# EAGLE board Servo_Cape (EAGLE 7.7.0)
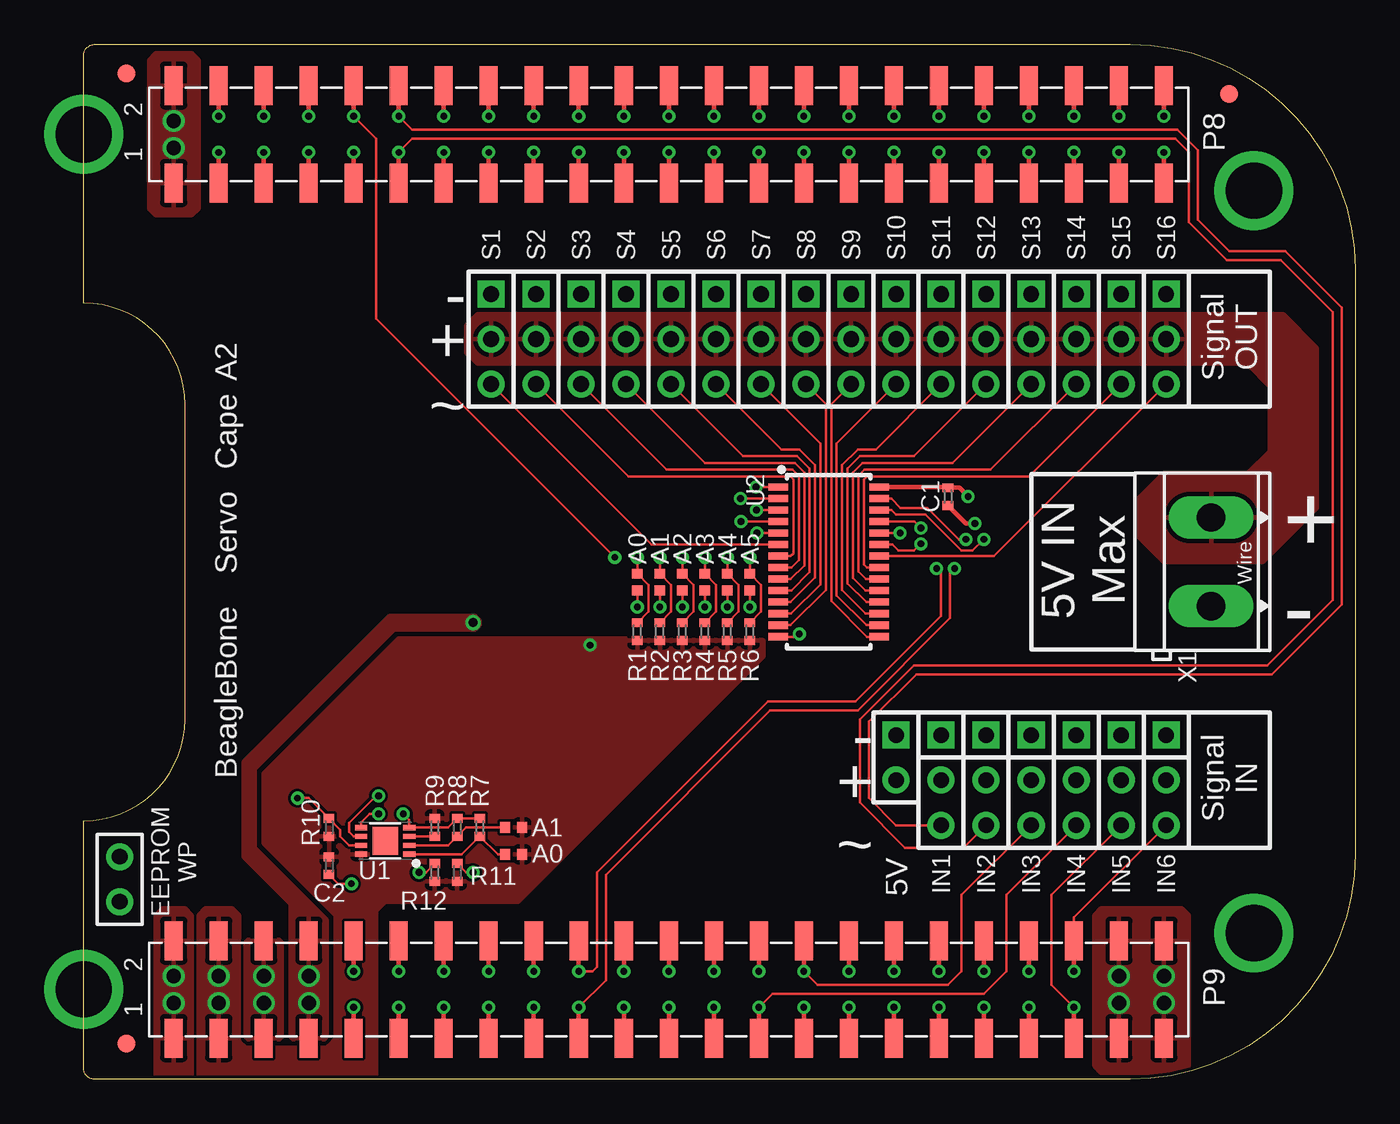
[diagram p0: board, top side]
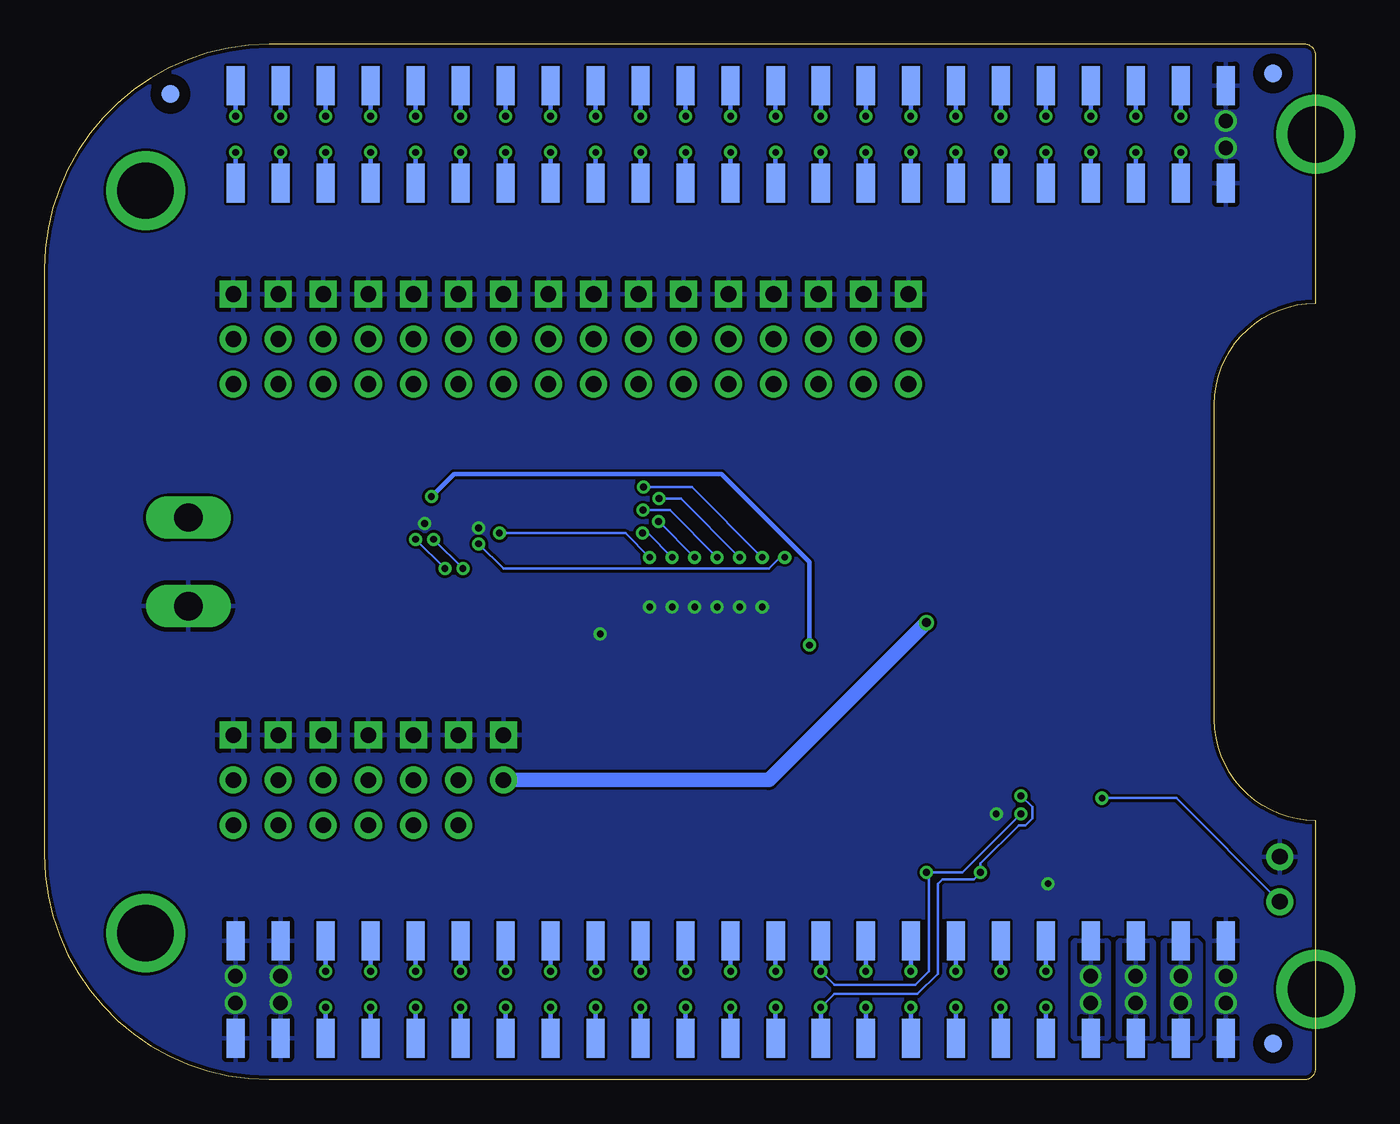
[diagram p1: board, bottom side, seen from below]

Size 71.75 x 58.42 mm. Coordinates in mm from the lower left corner, seen from the top.
Copper layers (1+16): Top 0.035mm / dielectric 1.5mm / Bottom 0.035mm
Design rules "SparkFun-2-layer *": minimum track width 6mil, minimum drill 15mil, track to track 6mil, track to pad 6mil, pad to pad 6mil, via to via 6mil, smd to smd 6mil, copper to edge 8mil, drill to drill 8mil, minimum pad ring 12mil, minimum via ring 7mil, stop-mask expansion 4mil, vias tented up to drill 32mil, thermal gap 10mil

## Footprints (pad centres in the part's own frame; a part is rotated, then mirrored left to right if it is on the bottom)
BEAGLEBONE.CAPE.TOP/BOTTOM-PADS = smd 1.02 x 2.2 bottom: B8.1 5.08,50.59; B8.2 5.08,56.09; B8.3 7.62,50.59; B8.4 7.62,56.09; B8.5 10.16,50.59; B8.6 10.16,56.09; B8.7 12.7,50.59; B8.8 12.7,56.09; B8.9 15.24,50.59; B8.10 15.24,56.09; B8.11 17.78,50.59; B8.12 17.78,56.09; B8.13 20.32,50.59; B8.14 20.32,56.09; B8.15 22.86,50.59; B8.16 22.86,56.09; B8.17 25.4,50.59; B8.18 25.4,56.09; B8.19 27.94,50.59; B8.20 27.94,56.09; B8.21 30.48,50.59; B8.22 30.48,56.09; B8.23 33.02,50.59; B8.24 33.02,56.09; B8.25 35.56,50.59; B8.26 35.56,56.09; B8.27 38.1,50.59; B8.28 38.1,56.09; B8.29 40.64,50.59; B8.30 40.64,56.09; B8.31 43.18,50.59; B8.32 43.18,56.09; B8.33 45.72,50.59; B8.34 45.72,56.09; B8.35 48.26,50.59; B8.36 48.26,56.09; B8.37 50.8,50.59; B8.38 50.8,56.09; B8.39 53.34,50.59; B8.40 53.34,56.09; B8.41 55.88,50.59; B8.42 55.88,56.09; B8.43 58.42,50.59; B8.44 58.42,56.09; B8.45 60.96,50.59; B8.46 60.96,56.09; B9.1 5.08,2.33; B9.2 5.08,7.83; B9.3 7.62,2.33; B9.4 7.62,7.83; B9.5 10.16,2.33; B9.6 10.16,7.83; B9.7 12.7,2.33; B9.8 12.7,7.83; B9.9 15.24,2.33; B9.10 15.24,7.83; B9.11 17.78,2.33; B9.12 17.78,7.83; B9.13 20.32,2.33; B9.14 20.32,7.83; B9.15 22.86,2.33; B9.16 22.86,7.83; B9.17 25.4,2.33; B9.18 25.4,7.83; B9.19 27.94,2.33; B9.20 27.94,7.83; B9.21 30.48,2.33; B9.22 30.48,7.83; B9.23 33.02,2.33; B9.24 33.02,7.83; B9.25 35.56,2.33; B9.26 35.56,7.83; B9.27 38.1,2.33; B9.28 38.1,7.83; B9.29 40.64,2.33; B9.30 40.64,7.83; B9.31 43.18,2.33; B9.32 43.18,7.83; B9.33 45.72,2.33; B9.34 45.72,7.83; B9.35 48.26,2.33; B9.36 48.26,7.83; B9.37 50.8,2.33; B9.38 50.8,7.83; B9.39 53.34,2.33; B9.40 53.34,7.83; B9.41 55.88,2.33; B9.42 55.88,7.83; B9.43 58.42,2.33; B9.44 58.42,7.83; B9.45 60.96,2.33; B9.46 60.96,7.83 | drill 3.175 pad 4.445: MH.1 0,5.08; MH.2 66.04,8.255; MH.3 66.04,50.165; MH.4 0,53.34 | smd 1.02 x 2.2: T8.1 5.08,50.59; T8.2 5.08,56.09; T8.3 7.62,50.59; T8.4 7.62,56.09; T8.5 10.16,50.59; T8.6 10.16,56.09; T8.7 12.7,50.59; T8.8 12.7,56.09; T8.9 15.24,50.59; T8.10 15.24,56.09; T8.11 17.78,50.59; T8.12 17.78,56.09; T8.13 20.32,50.59; T8.14 20.32,56.09; T8.15 22.86,50.59; T8.16 22.86,56.09; T8.17 25.4,50.59; T8.18 25.4,56.09; T8.19 27.94,50.59; T8.20 27.94,56.09; T8.21 30.48,50.59; T8.22 30.48,56.09; T8.23 33.02,50.59; T8.24 33.02,56.09; T8.25 35.56,50.59; T8.26 35.56,56.09; T8.27 38.1,50.59; T8.28 38.1,56.09; T8.29 40.64,50.59; T8.30 40.64,56.09; T8.31 43.18,50.59; T8.32 43.18,56.09; T8.33 45.72,50.59; T8.34 45.72,56.09; T8.35 48.26,50.59; T8.36 48.26,56.09; T8.37 50.8,50.59; T8.38 50.8,56.09; T8.39 53.34,50.59; T8.40 53.34,56.09; T8.41 55.88,50.59; T8.42 55.88,56.09; T8.43 58.42,50.59; T8.44 58.42,56.09; T8.45 60.96,50.59; T8.46 60.96,56.09; T9.1 5.08,2.33; T9.2 5.08,7.83; T9.3 7.62,2.33; T9.4 7.62,7.83; T9.5 10.16,2.33; T9.6 10.16,7.83; T9.7 12.7,2.33; T9.8 12.7,7.83; T9.9 15.24,2.33; T9.10 15.24,7.83; T9.11 17.78,2.33; T9.12 17.78,7.83; T9.13 20.32,2.33; T9.14 20.32,7.83; T9.15 22.86,2.33; T9.16 22.86,7.83; T9.17 25.4,2.33; T9.18 25.4,7.83; T9.19 27.94,2.33; T9.20 27.94,7.83; T9.21 30.48,2.33; T9.22 30.48,7.83; T9.23 33.02,2.33; T9.24 33.02,7.83; T9.25 35.56,2.33; T9.26 35.56,7.83; T9.27 38.1,2.33; T9.28 38.1,7.83; T9.29 40.64,2.33; T9.30 40.64,7.83; T9.31 43.18,2.33; T9.32 43.18,7.83; T9.33 45.72,2.33; T9.34 45.72,7.83; T9.35 48.26,2.33; T9.36 48.26,7.83; T9.37 50.8,2.33; T9.38 50.8,7.83; T9.39 53.34,2.33; T9.40 53.34,7.83; T9.41 55.88,2.33; T9.42 55.88,7.83; T9.43 58.42,2.33; T9.44 58.42,7.83; T9.45 60.96,2.33; T9.46 60.96,7.83
0402 = smd 0.5 x 0.6: 1 -0.5,0; 2 0.5,0
FIDUCIAL_40MIL = smd 1.016 x 1.016: P$1 0,0
TH-1X3-(35-MIL.DIA) = drill 0.889 pad 1.524 square: 1 -2.54,0 | drill 0.889 pad 1.524: 2 0,0; 3 2.54,0
JUMPER-(X2) = drill 0.889 pad 1.524: 1 -1.27,0; 2 1.27,0
SOLDER.JOINT(0402) = smd 0.55 x 0.6: 1 -0.475,0; 2 0.475,0
UDFN8,2X3(ON-SEMI) = smd 0.3 x 0.68: 1 0.75,1.36; 2 0.25,1.36; 3 -0.25,1.36; 4 -0.75,1.36; 5 -0.75,-1.36; 6 -0.25,-1.36; 7 0.25,-1.36; 8 0.75,-1.36 | smd 1.56 x 1.45: P$1 0,0
TSSOP28(NXP) = smd 0.4 x 1.1: 1 -4.225,-2.85; 2 -3.575,-2.85; 3 -2.925,-2.85; 4 -2.275,-2.85; 5 -1.625,-2.85; 6 -0.975,-2.85; 7 -0.325,-2.85; 8 0.325,-2.85; 9 0.975,-2.85; 10 1.625,-2.85; 11 2.275,-2.85; 12 2.925,-2.85; 13 3.575,-2.85; 14 4.225,-2.85; 15 4.225,2.85; 16 3.575,2.85; 17 2.925,2.85; 18 2.275,2.85; 19 1.625,2.85; 20 0.975,2.85; 21 0.325,2.85; 22 -0.325,2.85; 23 -0.975,2.85; 24 -1.625,2.85; 25 -2.275,2.85; 26 -2.925,2.85; 27 -3.575,2.85; 28 -4.225,2.85
TERMINAL.BLOCK-2TERM-5MM.PITCH = drill 1.6 pad 1.8 long: 1 -2.5,0; 2 2.5,0
TH-1X2-(35-MIL.DIA) = drill 0.889 pad 1.524 square: 1 -1.27,0 | drill 0.889 pad 1.524: 2 1.27,0

## Placement (x,y rotation side)
BB.CAPE2  BEAGLEBONE.CAPE.TOP/BOTTOM-PADS  [BEAGLEBONE.CAPE.TOP/BOTTOM-PADS]  0,0 0 top
C1  .1uF  [0402]  48.77,32.89 270 top
C2  .1uF  [0402]  13.84,12.06 270 top
FUD1  FIDUCIAL  [FIDUCIAL_40MIL]  2.41,2.03 0 top
FUD2  FIDUCIAL  [FIDUCIAL_40MIL]  64.64,55.63 0 top
FUD3  FIDUCIAL  [FIDUCIAL_40MIL]  2.41,56.77 0 top
FUD4  FIDUCIAL  [FIDUCIAL_40MIL]  2.41,2.03 0 bottom
FUD5  FIDUCIAL  [FIDUCIAL_40MIL]  64.64,55.63 0 bottom
FUD6  FIDUCIAL  [FIDUCIAL_40MIL]  2.41,56.77 0 bottom
IN1  [TH-1X3-(35-MIL.DIA)]  48.39,16.89 270 top
IN2  [TH-1X3-(35-MIL.DIA)]  50.93,16.89 270 top
IN3  [TH-1X3-(35-MIL.DIA)]  53.47,16.89 270 top
IN4  [TH-1X3-(35-MIL.DIA)]  56.01,16.89 270 top
IN5  [TH-1X3-(35-MIL.DIA)]  58.55,16.89 270 top
IN6  [TH-1X3-(35-MIL.DIA)]  61.09,16.89 270 top
JMP1  JUMPER-(X2)  [JUMPER-(X2)]  2.03,11.3 90 top
R1  1k  [0402]  31.24,25.27 90 top
R2  1k  [0402]  32.51,25.27 90 top
R3  1k  [0402]  33.78,25.27 90 top
R4  1k  [0402]  35.05,25.27 90 top
R5  1k  [0402]  36.32,25.27 90 top
R6  1k  [0402]  37.59,25.27 90 top
R7  1k  [0402]  22.35,14.22 270 top
R8  1k  [0402]  21.08,14.22 270 top
R9  1k  [0402]  19.81,14.22 270 top
R10  1k  [0402]  13.84,14.22 270 top
R11  DNP(2.2k)  [0402]  21.08,11.68 270 top
R12  DNP(2.2k)  [0402]  19.81,11.68 270 top
S1  [TH-1X3-(35-MIL.DIA)]  22.99,41.78 270 top
S2  [TH-1X3-(35-MIL.DIA)]  25.53,41.78 270 top
S3  [TH-1X3-(35-MIL.DIA)]  28.07,41.78 270 top
S4  [TH-1X3-(35-MIL.DIA)]  30.61,41.78 270 top
S5  [TH-1X3-(35-MIL.DIA)]  33.15,41.78 270 top
S6  [TH-1X3-(35-MIL.DIA)]  35.69,41.78 270 top
S7  [TH-1X3-(35-MIL.DIA)]  38.23,41.78 270 top
S8  [TH-1X3-(35-MIL.DIA)]  40.77,41.78 270 top
S9  [TH-1X3-(35-MIL.DIA)]  43.31,41.78 270 top
S10  [TH-1X3-(35-MIL.DIA)]  45.85,41.78 270 top
S11  [TH-1X3-(35-MIL.DIA)]  48.39,41.78 270 top
S12  [TH-1X3-(35-MIL.DIA)]  50.93,41.78 270 top
S13  [TH-1X3-(35-MIL.DIA)]  53.47,41.78 270 top
S14  [TH-1X3-(35-MIL.DIA)]  56.01,41.78 270 top
S15  [TH-1X3-(35-MIL.DIA)]  58.55,41.78 270 top
S16  [TH-1X3-(35-MIL.DIA)]  61.09,41.78 270 top
SJ1  [SOLDER.JOINT(0402)]  24.26,12.7 180 top
SJ2  [SOLDER.JOINT(0402)]  24.26,14.22 180 top
SJ3  [SOLDER.JOINT(0402)]  31.24,28.07 90 top
SJ4  [SOLDER.JOINT(0402)]  32.51,28.07 90 top
SJ5  [SOLDER.JOINT(0402)]  33.78,28.07 90 top
SJ6  [SOLDER.JOINT(0402)]  35.05,28.07 90 top
SJ7  [SOLDER.JOINT(0402)]  36.32,28.07 90 top
SJ8  [SOLDER.JOINT(0402)]  37.59,28.07 90 top
U1  CAT24C32  [UDFN8,2X3(ON-SEMI)]  17.02,13.46 270 top
U2  PCA9685(TSSOP)  [TSSOP28(NXP)]  42.04,29.21 270 top
X1  TB-2TERM-5MM.PITCH  [TERMINAL.BLOCK-2TERM-5MM.PITCH]  63.63,29.21 270 top
X2  [TH-1X2-(35-MIL.DIA)]  45.85,18.16 270 top

## Library data of the parts
BB.CAPE2 = GHI-Solutions
C1 C2 R1-R12 = GHI-BasicComponents
FUD1-FUD6 = GHI
IN1-IN6 JMP1 S1-S16 X2 = GHI-Headers
SJ1-SJ8 = GHI-Miscellaneous
U1 U2 = GHI-IC
X1 = GHI-Connectors

## Nets
+5V [power]: BB.CAPE2.B9.5 BB.CAPE2.B9.6 BB.CAPE2.T9.5 BB.CAPE2.T9.6
A0: R7.2 SJ1.2 U1.1
A1: R8.2 SJ2.2 U1.2
A2: R9.2 U1.3
GND: BB.CAPE2.B8.1 BB.CAPE2.B8.2 BB.CAPE2.B9.1 BB.CAPE2.B9.2 BB.CAPE2.B9.43 BB.CAPE2.B9.44 BB.CAPE2.B9.45 BB.CAPE2.B9.46 BB.CAPE2.T8.1 BB.CAPE2.T8.2 BB.CAPE2.T9.1 BB.CAPE2.T9.2 BB.CAPE2.T9.43 BB.CAPE2.T9.44 BB.CAPE2.T9.45 BB.CAPE2.T9.46 C1.2 C2.2 IN1.1 IN2.1 IN3.1 IN4.1 IN5.1 IN6.1 JMP1.2 R7.1 R8.1 S1.1 S2.1 S3.1 S4.1 S5.1 S6.1 S7.1 S8.1 S9.1 S10.1 S11.1 S12.1 S13.1 S14.1 S15.1 S16.1 SJ3.1 SJ4.1 SJ5.1 SJ6.1 SJ7.1 SJ8.1 U1.4 U2.14 U2.25 X1.2 X2.1
IN1: BB.CAPE2.B8.12 BB.CAPE2.T8.12 IN1.3
IN2: BB.CAPE2.B8.11 BB.CAPE2.T8.11 IN2.3
IN3: BB.CAPE2.B9.30 BB.CAPE2.T9.30 IN3.3
IN4: BB.CAPE2.B9.27 BB.CAPE2.T9.27 IN4.3
IN5: BB.CAPE2.B9.41 BB.CAPE2.T9.41 IN5.3
IN6: BB.CAPE2.B9.42 BB.CAPE2.T9.42 IN6.3
P8.3: BB.CAPE2.B8.3 BB.CAPE2.T8.3
P8.4: BB.CAPE2.B8.4 BB.CAPE2.T8.4
P8.5: BB.CAPE2.B8.5 BB.CAPE2.T8.5
P8.6: BB.CAPE2.B8.6 BB.CAPE2.T8.6
P8.7: BB.CAPE2.B8.7 BB.CAPE2.T8.7
P8.8: BB.CAPE2.B8.8 BB.CAPE2.T8.8
P8.9: BB.CAPE2.B8.9 BB.CAPE2.T8.9
P8.13: BB.CAPE2.B8.13 BB.CAPE2.T8.13
P8.14: BB.CAPE2.B8.14 BB.CAPE2.T8.14
P8.15: BB.CAPE2.B8.15 BB.CAPE2.T8.15
P8.16: BB.CAPE2.B8.16 BB.CAPE2.T8.16
P8.17: BB.CAPE2.B8.17 BB.CAPE2.T8.17
P8.18: BB.CAPE2.B8.18 BB.CAPE2.T8.18
P8.19: BB.CAPE2.B8.19 BB.CAPE2.T8.19
P8.20: BB.CAPE2.B8.20 BB.CAPE2.T8.20
P8.21: BB.CAPE2.B8.21 BB.CAPE2.T8.21
P8.22: BB.CAPE2.B8.22 BB.CAPE2.T8.22
P8.23: BB.CAPE2.B8.23 BB.CAPE2.T8.23
P8.24: BB.CAPE2.B8.24 BB.CAPE2.T8.24
P8.25: BB.CAPE2.B8.25 BB.CAPE2.T8.25
P8.26: BB.CAPE2.B8.26 BB.CAPE2.T8.26
P8.27: BB.CAPE2.B8.27 BB.CAPE2.T8.27
P8.28: BB.CAPE2.B8.28 BB.CAPE2.T8.28
P8.29: BB.CAPE2.B8.29 BB.CAPE2.T8.29
P8.30: BB.CAPE2.B8.30 BB.CAPE2.T8.30
P8.31: BB.CAPE2.B8.31 BB.CAPE2.T8.31
P8.32: BB.CAPE2.B8.32 BB.CAPE2.T8.32
P8.33: BB.CAPE2.B8.33 BB.CAPE2.T8.33
P8.34: BB.CAPE2.B8.34 BB.CAPE2.T8.34
P8.35: BB.CAPE2.B8.35 BB.CAPE2.T8.35
P8.36: BB.CAPE2.B8.36 BB.CAPE2.T8.36
P8.37: BB.CAPE2.B8.37 BB.CAPE2.T8.37
P8.38: BB.CAPE2.B8.38 BB.CAPE2.T8.38
P8.39: BB.CAPE2.B8.39 BB.CAPE2.T8.39
P8.40: BB.CAPE2.B8.40 BB.CAPE2.T8.40
P8.41: BB.CAPE2.B8.41 BB.CAPE2.T8.41
P8.42: BB.CAPE2.B8.42 BB.CAPE2.T8.42
P8.43: BB.CAPE2.B8.43 BB.CAPE2.T8.43
P8.44: BB.CAPE2.B8.44 BB.CAPE2.T8.44
P8.45: BB.CAPE2.B8.45 BB.CAPE2.T8.45
P8.46: BB.CAPE2.B8.46 BB.CAPE2.T8.46
P9.9: BB.CAPE2.B9.9 BB.CAPE2.T9.9
P9.10: BB.CAPE2.B9.10 BB.CAPE2.T9.10
P9.11: BB.CAPE2.B9.11 BB.CAPE2.T9.11
P9.12: BB.CAPE2.B9.12 BB.CAPE2.T9.12
P9.13: BB.CAPE2.B9.13 BB.CAPE2.T9.13
P9.14: BB.CAPE2.B9.14 BB.CAPE2.T9.14
P9.15: BB.CAPE2.B9.15 BB.CAPE2.T9.15
P9.16: BB.CAPE2.B9.16 BB.CAPE2.T9.16
P9.17: BB.CAPE2.B9.17 BB.CAPE2.T9.17
P9.18: BB.CAPE2.B9.18 BB.CAPE2.T9.18
P9.21: BB.CAPE2.B9.21 BB.CAPE2.T9.21
P9.22: BB.CAPE2.B9.22 BB.CAPE2.T9.22
P9.23: BB.CAPE2.B9.23 BB.CAPE2.T9.23
P9.24: BB.CAPE2.B9.24 BB.CAPE2.T9.24
P9.25: BB.CAPE2.B9.25 BB.CAPE2.T9.25
P9.26: BB.CAPE2.B9.26 BB.CAPE2.T9.26
P9.28: BB.CAPE2.B9.28 BB.CAPE2.T9.28
P9.29: BB.CAPE2.B9.29 BB.CAPE2.T9.29
P9.31: BB.CAPE2.B9.31 BB.CAPE2.T9.31
P9.32: BB.CAPE2.B9.32 BB.CAPE2.T9.32
P9.33: BB.CAPE2.B9.33 BB.CAPE2.T9.33
P9.34: BB.CAPE2.B9.34 BB.CAPE2.T9.34
P9.35: BB.CAPE2.B9.35 BB.CAPE2.T9.35
P9.36: BB.CAPE2.B9.36 BB.CAPE2.T9.36
P9.37: BB.CAPE2.B9.37 BB.CAPE2.T9.37
P9.38: BB.CAPE2.B9.38 BB.CAPE2.T9.38
P9.39: BB.CAPE2.B9.39 BB.CAPE2.T9.39
P9.40: BB.CAPE2.B9.40 BB.CAPE2.T9.40
PWM0: S1.3 U2.6
PWM1: S2.3 U2.7
PWM2: S3.3 U2.8
PWM3: S4.3 U2.9
PWM4: S5.3 U2.10
PWM5: S6.3 U2.11
PWM6: S7.3 U2.12
PWM7: S8.3 U2.13
PWM8: S9.3 U2.15
PWM9: S10.3 U2.16
PWM10: S11.3 U2.17
PWM11: S12.3 U2.18
PWM12: S13.3 U2.19
PWM13: S14.3 U2.20
PWM14: S15.3 U2.21
PWM15: S16.3 U2.22
SCL: BB.CAPE2.B9.19 BB.CAPE2.T9.19 R12.1 U1.6 U2.26
SDA: BB.CAPE2.B9.20 BB.CAPE2.T9.20 R11.1 U1.5 U2.27
SERVO.ENABLE: BB.CAPE2.B8.10 BB.CAPE2.T8.10 U2.23
U2.A0: R1.2 SJ3.2 U2.1
U2.A1: R2.2 SJ4.2 U2.2
U2.A2: R3.2 SJ5.2 U2.3
U2.A3: R4.2 SJ6.2 U2.4
U2.A4: R5.2 SJ7.2 U2.5
U2.A5: R6.2 SJ8.2 U2.24
VCC: BB.CAPE2.B9.3 BB.CAPE2.B9.4 BB.CAPE2.T9.3 BB.CAPE2.T9.4 C1.1 C2.1 R1.1 R2.1 R3.1 R4.1 R5.1 R6.1 R9.1 R10.2 R11.2 R12.2 SJ1.1 SJ2.1 U1.8 U2.28
VIN: S1.2 S2.2 S3.2 S4.2 S5.2 S6.2 S7.2 S8.2 S9.2 S10.2 S11.2 S12.2 S13.2 S14.2 S15.2 S16.2 X1.1
VOUT: BB.CAPE2.B9.7 BB.CAPE2.B9.8 BB.CAPE2.T9.7 BB.CAPE2.T9.8 X2.2
WP: JMP1.1 R10.1 U1.7

## Tracks (layer width: path | path; a pad name or v marks a point on that pad's centre or on a via)
+5V  (via drill 0.81 pad 0.18)
  other vias: 10.16,4.32 10.16,5.84
  pour Bottom: 10.79,8.13 9.53,8.13 9.14,7.75 9.14,2.41 9.53,2.03 10.79,2.03 11.18,2.41 11.18,7.75
  pour Top: 10.79,8.13 9.53,8.13 9.14,7.75 9.14,2.41 9.53,2.03 10.79,2.03 11.18,2.41 11.18,7.75
A0
  Top 0.152: U1.1 21.34,12.71 R7.2 23.38,12.7 SJ1.2
A1
  Top 0.152: U1.2 20.57,13.21 R8.2 21.58,14.22 SJ2.2
A2
  Top 0.152: U1.3 R9.2
GND  (via drill 0.38 pad 0.18, 0.81 pad 0.18)
  Top 0.152: v18.03,14.99 18.38,14.64 U1.4 20.57,14.21 R8.1 R7.1 | C2.2 14.36,11.05 v15.11,11.05 | SJ3.1 v31.24,26.67 | SJ4.1 v32.51,26.67 | SJ5.1 v33.78,26.67 | SJ6.1 v35.05,26.67 | SJ7.1 v36.32,26.67 | SJ8.1 v37.59,26.67 | U2.25 46.87,31.48 v47.24,31.11 | U2.14 40.23,24.98 v40.39,25.15
  Top 0.254: C1.2 49.79,31.37 v50.29,31.37
  other vias: 58.42,4.32 60.96,4.32 5.08,52.58 5.08,54.1 58.42,5.84 60.96,5.84 5.08,5.84 5.08,4.32
  pour Bottom (rank 2): 72.39,59.05 -0.64,59.05 -0.64,-0.64 72.39,-0.64
  pour Top: 61.98,9.65 57.4,9.65 57.02,9.27 57.02,0.76 57.4,0.38 61.98,0.38 62.36,0.76 62.36,9.27
  pour Top: 4.06,57.91 6.1,57.91 6.48,57.53 6.48,49.15 6.1,48.77 4.06,48.77 3.68,49.15 3.68,57.53
  pour Top: 5.71,9.65 4.45,9.65 4.06,9.27 4.06,-0.13 6.1,-0.13 6.1,9.27
IN1  (via drill 0.38 pad 0.18)
  Top 0.152: v17.78,54.36 18.54,53.59 61.72,53.59 62.87,52.45 62.87,48.51 64.64,46.74 67.82,46.74 70.99,43.56 70.99,26.8 67.06,22.86 46.99,22.86 44.32,20.19 44.32,15.88 45.85,14.35 IN1.3
  Top 0.254: v17.78,54.36 BB.CAPE2.T8.12
  Bottom 0.254: v17.78,54.36 BB.CAPE2.T8.12
IN2  (via drill 0.38 pad 0.18)
  Top 0.152: v17.78,52.32 18.54,53.09 61.59,53.09 62.36,52.32 62.36,48.39 64.52,46.23 67.56,46.23 70.48,43.31 70.48,27.05 66.8,23.37 46.86,23.37 43.81,20.32 43.81,15.62 46.35,13.08 49.66,13.08 IN2.3
  Top 0.254: v17.78,52.32 BB.CAPE2.T8.11
  Bottom 0.254: BB.CAPE2.T8.11 v17.78,52.32
IN3  (via drill 0.38 pad 0.18)
  Top 0.152: v40.64,6.1 41.4,5.33 48.77,5.33 49.53,6.1 49.53,10.41 IN3.3
  Top 0.254: v40.64,6.1 BB.CAPE2.B9.30
  Bottom 0.254: BB.CAPE2.B9.30 v40.64,6.1
IN4  (via drill 0.38 pad 0.18)
  Top 0.152: IN4.3 52.07,10.41 52.07,6.1 50.8,4.83 38.86,4.83 v38.1,4.06
  Top 0.254: v38.1,4.06 BB.CAPE2.B9.27
  Bottom 0.254: v38.1,4.06 BB.CAPE2.B9.27
IN5  (via drill 0.38 pad 0.18)
  Top 0.152: v55.88,4.06 54.61,5.33 54.61,10.41 IN5.3
  Top 0.254: v55.88,4.06 BB.CAPE2.T9.41
  Bottom 0.254: BB.CAPE2.T9.41 v55.88,4.06
IN6  (via drill 0.38 pad 0.18)
  Top 0.152: IN6.3 55.88,9.14 BB.CAPE2.T9.42
  Top 0.254: BB.CAPE2.T9.42 v55.88,6.1
  Bottom 0.254: v55.88,6.1 BB.CAPE2.T9.42
P8.3  (via drill 0.38 pad 0.18)
  Top 0.254: v7.62,52.32 BB.CAPE2.B8.3
  Bottom 0.254: BB.CAPE2.B8.3 v7.62,52.32
P8.4  (via drill 0.38 pad 0.18)
  Top 0.254: BB.CAPE2.B8.4 v7.62,54.36
  Bottom 0.254: v7.62,54.36 BB.CAPE2.B8.4
P8.5  (via drill 0.38 pad 0.18)
  Top 0.254: BB.CAPE2.T8.5 v10.16,52.32
  Bottom 0.254: v10.16,52.32 BB.CAPE2.T8.5
P8.6  (via drill 0.38 pad 0.18)
  Top 0.254: v10.16,54.36 BB.CAPE2.B8.6
  Bottom 0.254: BB.CAPE2.B8.6 v10.16,54.36
P8.7  (via drill 0.38 pad 0.18)
  Top 0.254: v12.7,52.32 BB.CAPE2.T8.7
  Bottom 0.254: BB.CAPE2.T8.7 v12.7,52.32
P8.8  (via drill 0.38 pad 0.18)
  Top 0.254: BB.CAPE2.T8.8 v12.7,54.36
  Bottom 0.254: v12.7,54.36 BB.CAPE2.T8.8
P8.9  (via drill 0.38 pad 0.18)
  Top 0.254: BB.CAPE2.T8.9 v15.24,52.32
  Bottom 0.254: v15.24,52.32 BB.CAPE2.T8.9
P8.13  (via drill 0.38 pad 0.18)
  Top 0.254: v20.32,52.32 BB.CAPE2.T8.13
  Bottom 0.254: BB.CAPE2.T8.13 v20.32,52.32
P8.14  (via drill 0.38 pad 0.18)
  Top 0.254: v20.32,54.36 BB.CAPE2.B8.14
  Bottom 0.254: BB.CAPE2.B8.14 v20.32,54.36
P8.15  (via drill 0.38 pad 0.18)
  Top 0.254: BB.CAPE2.T8.15 v22.86,52.32
  Bottom 0.254: v22.86,52.32 BB.CAPE2.T8.15
P8.16  (via drill 0.38 pad 0.18)
  Top 0.254: BB.CAPE2.B8.16 v22.86,54.36
  Bottom 0.254: v22.86,54.36 BB.CAPE2.B8.16
P8.17  (via drill 0.38 pad 0.18)
  Top 0.254: v25.4,52.32 BB.CAPE2.T8.17
  Bottom 0.254: BB.CAPE2.T8.17 v25.4,52.32
P8.18  (via drill 0.38 pad 0.18)
  Top 0.254: v25.4,54.36 BB.CAPE2.B8.18
  Bottom 0.254: BB.CAPE2.B8.18 v25.4,54.36
P8.19  (via drill 0.38 pad 0.18)
  Top 0.254: BB.CAPE2.T8.19 v27.94,52.32
  Bottom 0.254: v27.94,52.32 BB.CAPE2.T8.19
P8.20  (via drill 0.38 pad 0.18)
  Top 0.254: BB.CAPE2.T8.20 v27.94,54.36
  Bottom 0.254: v27.94,54.36 BB.CAPE2.T8.20
P8.21  (via drill 0.38 pad 0.18)
  Top 0.254: v30.48,52.32 BB.CAPE2.B8.21
  Bottom 0.254: BB.CAPE2.B8.21 v30.48,52.32
P8.22  (via drill 0.38 pad 0.18)
  Top 0.254: BB.CAPE2.T8.22 v30.48,54.36
  Bottom 0.254: v30.48,54.36 BB.CAPE2.T8.22
P8.23  (via drill 0.38 pad 0.18)
  Top 0.254: BB.CAPE2.B8.23 v33.02,52.32
  Bottom 0.254: v33.02,52.32 BB.CAPE2.B8.23
P8.24  (via drill 0.38 pad 0.18)
  Top 0.254: v33.02,54.36 BB.CAPE2.T8.24
  Bottom 0.254: BB.CAPE2.T8.24 v33.02,54.36
P8.25  (via drill 0.38 pad 0.18)
  Top 0.254: BB.CAPE2.T8.25 v35.56,52.32
  Bottom 0.254: v35.56,52.32 BB.CAPE2.T8.25
P8.26  (via drill 0.38 pad 0.18)
  Top 0.254: v35.56,54.36 BB.CAPE2.B8.26
  Bottom 0.254: BB.CAPE2.B8.26 v35.56,54.36
P8.27  (via drill 0.38 pad 0.18)
  Top 0.254: v38.1,52.32 BB.CAPE2.B8.27
  Bottom 0.254: BB.CAPE2.B8.27 v38.1,52.32
P8.28  (via drill 0.38 pad 0.18)
  Top 0.254: BB.CAPE2.T8.28 v38.1,54.36
  Bottom 0.254: v38.1,54.36 BB.CAPE2.T8.28
P8.29  (via drill 0.38 pad 0.18)
  Top 0.254: BB.CAPE2.T8.29 v40.64,52.32
  Bottom 0.254: v40.64,52.32 BB.CAPE2.T8.29
P8.30  (via drill 0.38 pad 0.18)
  Top 0.254: v40.64,54.36 BB.CAPE2.B8.30
  Bottom 0.254: BB.CAPE2.B8.30 v40.64,54.36
P8.31  (via drill 0.38 pad 0.18)
  Top 0.254: v43.18,52.32 BB.CAPE2.T8.31
  Bottom 0.254: BB.CAPE2.T8.31 v43.18,52.32
P8.32  (via drill 0.38 pad 0.18)
  Top 0.254: BB.CAPE2.B8.32 v43.18,54.36
  Bottom 0.254: v43.18,54.36 BB.CAPE2.B8.32
P8.33  (via drill 0.38 pad 0.18)
  Top 0.254: BB.CAPE2.B8.33 v45.72,52.32
  Bottom 0.254: v45.72,52.32 BB.CAPE2.B8.33
P8.34  (via drill 0.38 pad 0.18)
  Top 0.254: v45.72,54.36 BB.CAPE2.T8.34
  Bottom 0.254: BB.CAPE2.T8.34 v45.72,54.36
P8.35  (via drill 0.38 pad 0.18)
  Top 0.254: v48.26,52.32 BB.CAPE2.T8.35
  Bottom 0.254: BB.CAPE2.T8.35 v48.26,52.32
P8.36  (via drill 0.38 pad 0.18)
  Top 0.254: BB.CAPE2.T8.36 v48.26,54.36
  Bottom 0.254: v48.26,54.36 BB.CAPE2.T8.36
P8.37  (via drill 0.38 pad 0.18)
  Top 0.254: BB.CAPE2.B8.37 v50.8,52.32
  Bottom 0.254: v50.8,52.32 BB.CAPE2.B8.37
P8.38  (via drill 0.38 pad 0.18)
  Top 0.254: v50.8,54.36 BB.CAPE2.T8.38
  Bottom 0.254: BB.CAPE2.T8.38 v50.8,54.36
P8.39  (via drill 0.38 pad 0.18)
  Top 0.254: v53.34,52.32 BB.CAPE2.B8.39
  Bottom 0.254: BB.CAPE2.B8.39 v53.34,52.32
P8.40  (via drill 0.38 pad 0.18)
  Top 0.254: BB.CAPE2.T8.40 v53.34,54.36
  Bottom 0.254: v53.34,54.36 BB.CAPE2.T8.40
P8.41  (via drill 0.38 pad 0.18)
  Top 0.254: BB.CAPE2.T8.41 v55.88,52.32
  Bottom 0.254: v55.88,52.32 BB.CAPE2.T8.41
P8.42  (via drill 0.38 pad 0.18)
  Top 0.254: v55.88,54.36 BB.CAPE2.B8.42
  Bottom 0.254: BB.CAPE2.B8.42 v55.88,54.36
P8.43  (via drill 0.38 pad 0.18)
  Top 0.254: v58.42,52.32 BB.CAPE2.B8.43
  Bottom 0.254: BB.CAPE2.B8.43 v58.42,52.32
P8.44  (via drill 0.38 pad 0.18)
  Top 0.254: BB.CAPE2.T8.44 v58.42,54.36
  Bottom 0.254: v58.42,54.36 BB.CAPE2.T8.44
P8.45  (via drill 0.38 pad 0.18)
  Top 0.254: BB.CAPE2.B8.45 v60.96,52.32
  Bottom 0.254: v60.96,52.32 BB.CAPE2.B8.45
P8.46  (via drill 0.38 pad 0.18)
  Top 0.254: v60.96,54.36 BB.CAPE2.B8.46
  Bottom 0.254: BB.CAPE2.B8.46 v60.96,54.36
P9.9  (via drill 0.38 pad 0.18)
  Top 0.254: v15.24,4.06 BB.CAPE2.T9.9
  Bottom 0.254: BB.CAPE2.T9.9 v15.24,4.06
P9.10  (via drill 0.38 pad 0.18)
  Top 0.254: BB.CAPE2.T9.10 v15.24,6.1
  Bottom 0.254: v15.24,6.1 BB.CAPE2.T9.10
P9.11  (via drill 0.38 pad 0.18)
  Top 0.254: BB.CAPE2.B9.11 v17.78,4.06
  Bottom 0.254: v17.78,4.06 BB.CAPE2.B9.11
P9.12  (via drill 0.38 pad 0.18)
  Top 0.254: v17.78,6.1 BB.CAPE2.B9.12
  Bottom 0.254: BB.CAPE2.B9.12 v17.78,6.1
P9.13  (via drill 0.38 pad 0.18)
  Top 0.254: v20.32,4.06 BB.CAPE2.B9.13
  Bottom 0.254: BB.CAPE2.B9.13 v20.32,4.06
P9.14  (via drill 0.38 pad 0.18)
  Top 0.254: BB.CAPE2.T9.14 v20.32,6.1
  Bottom 0.254: v20.32,6.1 BB.CAPE2.T9.14
P9.15  (via drill 0.38 pad 0.18)
  Top 0.254: BB.CAPE2.B9.15 v22.86,4.06
  Bottom 0.254: v22.86,4.06 BB.CAPE2.B9.15
P9.16  (via drill 0.38 pad 0.18)
  Top 0.254: v22.86,6.1 BB.CAPE2.B9.16
  Bottom 0.254: BB.CAPE2.B9.16 v22.86,6.1
P9.17  (via drill 0.38 pad 0.18)
  Top 0.254: v25.4,4.06 BB.CAPE2.B9.17
  Bottom 0.254: BB.CAPE2.B9.17 v25.4,4.06
P9.18  (via drill 0.38 pad 0.18)
  Top 0.254: BB.CAPE2.T9.18 v25.4,6.1
  Bottom 0.254: v25.4,6.1 BB.CAPE2.T9.18
P9.21  (via drill 0.38 pad 0.18)
  Top 0.254: BB.CAPE2.B9.21 v30.48,4.06
  Bottom 0.254: v30.48,4.06 BB.CAPE2.B9.21
P9.22  (via drill 0.38 pad 0.18)
  Top 0.254: v30.48,6.1 BB.CAPE2.T9.22
  Bottom 0.254: BB.CAPE2.T9.22 v30.48,6.1
P9.23  (via drill 0.38 pad 0.18)
  Top 0.254: v33.02,4.06 BB.CAPE2.B9.23
  Bottom 0.254: BB.CAPE2.B9.23 v33.02,4.06
P9.24  (via drill 0.38 pad 0.18)
  Top 0.254: BB.CAPE2.T9.24 v33.02,6.1
  Bottom 0.254: v33.02,6.1 BB.CAPE2.T9.24
P9.25  (via drill 0.38 pad 0.18)
  Top 0.254: BB.CAPE2.T9.25 v35.56,4.06
  Bottom 0.254: v35.56,4.06 BB.CAPE2.T9.25
P9.26  (via drill 0.38 pad 0.18)
  Top 0.254: v35.56,6.1 BB.CAPE2.B9.26
  Bottom 0.254: BB.CAPE2.B9.26 v35.56,6.1
P9.28  (via drill 0.38 pad 0.18)
  Top 0.254: BB.CAPE2.T9.28 v38.1,6.1
  Bottom 0.254: v38.1,6.1 BB.CAPE2.T9.28
P9.29  (via drill 0.38 pad 0.18)
  Top 0.254: BB.CAPE2.T9.29 v40.64,4.06
  Bottom 0.254: v40.64,4.06 BB.CAPE2.T9.29
P9.31  (via drill 0.38 pad 0.18)
  Top 0.254: v43.18,4.06 BB.CAPE2.T9.31
  Bottom 0.254: BB.CAPE2.T9.31 v43.18,4.06
P9.32  (via drill 0.38 pad 0.18)
  Top 0.254: BB.CAPE2.B9.32 v43.18,6.1
  Bottom 0.254: v43.18,6.1 BB.CAPE2.B9.32
P9.33  (via drill 0.38 pad 0.18)
  Top 0.254: BB.CAPE2.B9.33 v45.72,4.06
  Bottom 0.254: v45.72,4.06 BB.CAPE2.B9.33
P9.34  (via drill 0.38 pad 0.18)
  Top 0.254: v45.72,6.1 BB.CAPE2.T9.34
  Bottom 0.254: BB.CAPE2.T9.34 v45.72,6.1
P9.35  (via drill 0.38 pad 0.18)
  Top 0.254: v48.26,4.06 BB.CAPE2.B9.35
  Bottom 0.254: BB.CAPE2.B9.35 v48.26,4.06
P9.36  (via drill 0.38 pad 0.18)
  Top 0.254: BB.CAPE2.B9.36 v48.26,6.1
  Bottom 0.254: v48.26,6.1 BB.CAPE2.B9.36
P9.37  (via drill 0.38 pad 0.18)
  Top 0.254: BB.CAPE2.T9.37 v50.8,4.06
  Bottom 0.254: v50.8,4.06 BB.CAPE2.T9.37
P9.38  (via drill 0.38 pad 0.18)
  Top 0.254: v50.8,6.1 BB.CAPE2.T9.38
  Bottom 0.254: BB.CAPE2.T9.38 v50.8,6.1
P9.39  (via drill 0.38 pad 0.18)
  Top 0.254: v53.34,4.06 BB.CAPE2.B9.39
  Bottom 0.254: BB.CAPE2.B9.39 v53.34,4.06
P9.40  (via drill 0.38 pad 0.18)
  Top 0.254: BB.CAPE2.B9.40 v53.34,6.1
  Bottom 0.254: v53.34,6.1 BB.CAPE2.B9.40
PWM0
  Top 0.152: U2.6 32.05,30.18 S1.3
PWM1
  Top 0.152: U2.7 39.9,29.54 40.06,29.69 40.06,33.86 39.88,34.04 30.73,34.04 S2.3
PWM2
  Top 0.152: U2.8 39.93,28.89 40.36,29.31 40.36,34.06 40.01,34.42 32.89,34.42 S3.3
PWM3
  Top 0.152: U2.9 39.89,28.23 40.66,29.01 40.66,34.27 40.13,34.8 35.05,34.8 S4.3
PWM4
  Top 0.152: U2.10 39.93,27.59 40.97,28.63 40.97,34.47 40.26,35.18 37.21,35.18 S5.3
PWM5
  Top 0.152: U2.11 39.89,26.93 41.27,28.32 41.27,34.67 40.39,35.56 39.37,35.56 S6.3
PWM6
  Top 0.152: U2.12 39.92,26.29 41.58,27.94 41.58,35.89 S7.3
PWM7
  Top 0.152: U2.13 39.88,25.64 41.88,27.64 41.88,38.12 S8.3
PWM8
  Top 0.152: U2.15 44.2,24.98 42.19,27 42.19,38.12 S9.3
PWM9
  Top 0.152: U2.16 44.16,25.64 42.49,27.3 42.49,35.89 S10.3
PWM10
  Top 0.152: U2.17 44.12,26.29 42.8,27.61 42.8,34.67 43.69,35.56 44.7,35.56 S11.3
PWM11
  Top 0.152: U2.18 44.16,26.93 43.1,27.99 43.1,34.47 43.81,35.18 46.86,35.18 S12.3
PWM12
  Top 0.152: U2.19 44.12,27.59 43.41,28.3 43.41,34.27 43.94,34.8 49.02,34.8 S13.3
PWM13
  Top 0.152: U2.20 44.16,28.23 43.71,28.68 43.71,34.06 44.07,34.42 51.18,34.42 S14.3
PWM14
  Top 0.152: U2.21 44.19,28.89 44.02,29.06 44.02,33.86 44.2,34.04 53.34,34.04 S15.3
PWM15
  Top 0.152: U2.22 51.38,29.54 S16.3
SCL  (via drill 0.38 pad 0.18)
  Top 0.152: U1.6 15.24,13.71 14.99,13.97 14.99,14.48 16.51,16 v16.64,16 | R12.1 19.31,11.68 v18.92,11.68 | v50.8,30.48 50.16,29.84 49.53,29.84 47.5,31.88 45.85,31.88 45.59,32.13 U2.26 | v49.15,28.83 48.9,28.57 48.9,26.04 43.69,20.83 38.73,20.83 29.46,11.56 29.46,5.59 v27.94,4.06
  Top 0.254: v27.94,4.06 BB.CAPE2.B9.19
  Bottom 0.152: v27.94,4.06 27.18,4.83 22.48,4.83 21.34,5.97 21.34,11.05 21.08,11.3 19.3,11.3 v18.92,11.68 18.92,12.19 16.76,14.35 16.38,14.35 16,14.73 16,15.37 v16.64,16 | v50.8,30.48 v49.15,28.83
  Bottom 0.254: v27.94,4.06 BB.CAPE2.B9.19
SDA  (via drill 0.38 pad 0.18)
  Top 0.152: R11.1 21.58,11.68 v21.97,11.68 | U1.5 15.66,14.52 16.13,14.99 v16.64,14.99 | U2.27 45.57,32.78 46.1,32.26 47.62,32.26 49.4,30.48 v49.78,30.48 | v48.13,28.83 48.39,28.57 48.39,26.16 43.56,21.34 38.61,21.34 28.96,11.68 28.96,6.35 28.7,6.1 v27.94,6.1
  Top 0.254: v27.94,6.1 BB.CAPE2.B9.20
  Bottom 0.152: v16.64,14.99 19.94,11.68 v21.97,11.68 21.84,11.56 21.84,6.1 22.61,5.33 27.18,5.33 v27.94,6.1 | v49.78,30.48 v48.13,28.83
  Bottom 0.254: v27.94,6.1 BB.CAPE2.B9.20
SERVO.ENABLE  (via drill 0.38 pad 0.18)
  Top 0.152: U2.23 45.63,30.18 45.97,29.84 46.86,29.84 v47.24,30.23 | v29.97,29.46 16.51,42.93 16.51,53.09 v15.24,54.36
  Top 0.254: v15.24,54.36 BB.CAPE2.B8.10
  Bottom 0.152: v47.24,30.23 45.85,28.83 30.86,28.83 30.23,29.46 v29.97,29.46
  Bottom 0.254: BB.CAPE2.B8.10 v15.24,54.36
U2.A0  (via drill 0.38 pad 0.18)
  Top 0.152: U2.1 v37.94,33.44 | R1.2 31.88,26.41 31.88,27.91 SJ3.2 v31.24,29.46
  Bottom 0.152: v37.94,33.44 35.21,33.44 v31.24,29.46
U2.A1  (via drill 0.38 pad 0.18)
  Top 0.152: U2.2 v37.06,32.78 | R2.2 33.15,26.41 33.15,27.91 SJ4.2 v32.51,29.46
  Bottom 0.152: v37.06,32.78 35.83,32.78 v32.51,29.46
U2.A2  (via drill 0.38 pad 0.18)
  Top 0.152: U2.3 v37.97,32.13 | R3.2 34.42,26.41 34.42,27.91 SJ5.2 v33.78,29.46
  Bottom 0.152: v37.97,32.13 36.45,32.13 v33.78,29.46
U2.A3  (via drill 0.38 pad 0.18)
  Top 0.152: U2.4 v37.09,31.48 | R4.2 35.69,26.41 35.69,27.91 SJ6.2 v35.05,29.46
  Bottom 0.152: v37.09,31.48 37.07,31.48 v35.05,29.46
U2.A4  (via drill 0.38 pad 0.18)
  Top 0.152: U2.5 v38,30.84 | R5.2 36.96,26.41 36.96,27.91 SJ7.2 v36.32,29.46
  Bottom 0.152: v38,30.84 37.69,30.84 v36.32,29.46
U2.A5  (via drill 0.38 pad 0.18)
  Top 0.152: U2.24 v46.08,30.84 | R6.2 38.23,26.41 38.23,27.91 SJ8.2 v37.59,29.46
  Bottom 0.152: v37.59,29.46 38.96,30.84 v46.08,30.84
VCC  (via drill 0.38 pad 0.18, 0.81 pad 0.18)
  Top 0.254: v49.91,32.89 49.41,33.39 C1.1 48.73,33.44 U2.28
  Bottom 0.254: v49.91,32.89 48.64,34.16 33.53,34.16 28.57,29.21 v28.57,24.51
  other vias: 7.62,4.32 7.62,5.84
  pour Bottom: 8.26,8.13 6.99,8.13 6.48,7.62 6.48,2.54 6.99,2.03 8.26,2.03 8.64,2.41 8.64,7.75
  pour Top (rank 2): 6.48,-0.38 16.51,-0.38 16.51,9.53 17.02,10.03 24.51,10.03 38.35,23.88 38.35,24.77 38.23,24.89 17.78,24.89 10.16,17.27 10.16,13.34 14.22,9.27 14.22,2.29 13.72,1.78 9.14,1.78 8.76,2.16 8.76,9.27 8.38,9.65 6.86,9.65 6.48,9.27
VIN
  pour Top: 67.69,43.18 22.23,43.18 21.59,42.55 21.59,41.02 22.23,40.39 65.66,40.39 66.93,39.12 66.93,35.43 65.71,34.21 60.96,34.21 59.44,32.69 59.44,30.73 60.96,29.21 66.55,29.21 69.6,32.26 69.6,41.27
VOUT  (via drill 0.51 pad 0.18, 0.81 pad 0.18)
  Bottom 0.813: v21.97,25.78 30.86,16.89 X2.2
  other vias: 12.7,4.32 12.7,5.84
  pour Bottom: 11.68,7.75 11.68,2.41 12.06,2.03 13.34,2.03 13.72,2.41 13.72,7.75 13.34,8.13 12.06,8.13
  pour Top: 13.72,2.41 13.72,9.02 9.65,13.08 9.65,17.53 17.53,25.4 22.1,25.4 22.35,25.65 22.35,25.91 22.1,26.16 17.27,26.16 9.02,17.91 9.02,12.57 11.68,9.91 11.68,2.41 12.06,2.03 13.34,2.03
WP  (via drill 0.38 pad 0.18)
  Top 0.152: U1.7 14.98,13.21 14.48,13.72 14.48,14.09 R10.1 12.69,15.88 v12.06,15.88
  Bottom 0.152: v12.06,15.88 7.87,15.88 JMP1.1

## Text on the board
tPlace: - | + | Signal / OUT | A2 | ~ | Cape | + | Servo | A0 | A1 | A2 | A3 | A4 | A5 | 5V IN / Max | - | BeagleBone | - | + | Signal / IN | A1 | A0 | ~ | EEPROM / WP | 5V